# Altium PCB Giro_scope_2.0.PcbDoc
Units mil, origin at the board's own origin, x right, y up, seen from the top; angles counter-clockwise.
Board outline 7875 x 3935 mil, 2 copper layers (Top Layer, Bottom Layer); 230 components, 115 nets, 573 pads, 7 vias.
Unrouted connection lines stored in the file: 365.
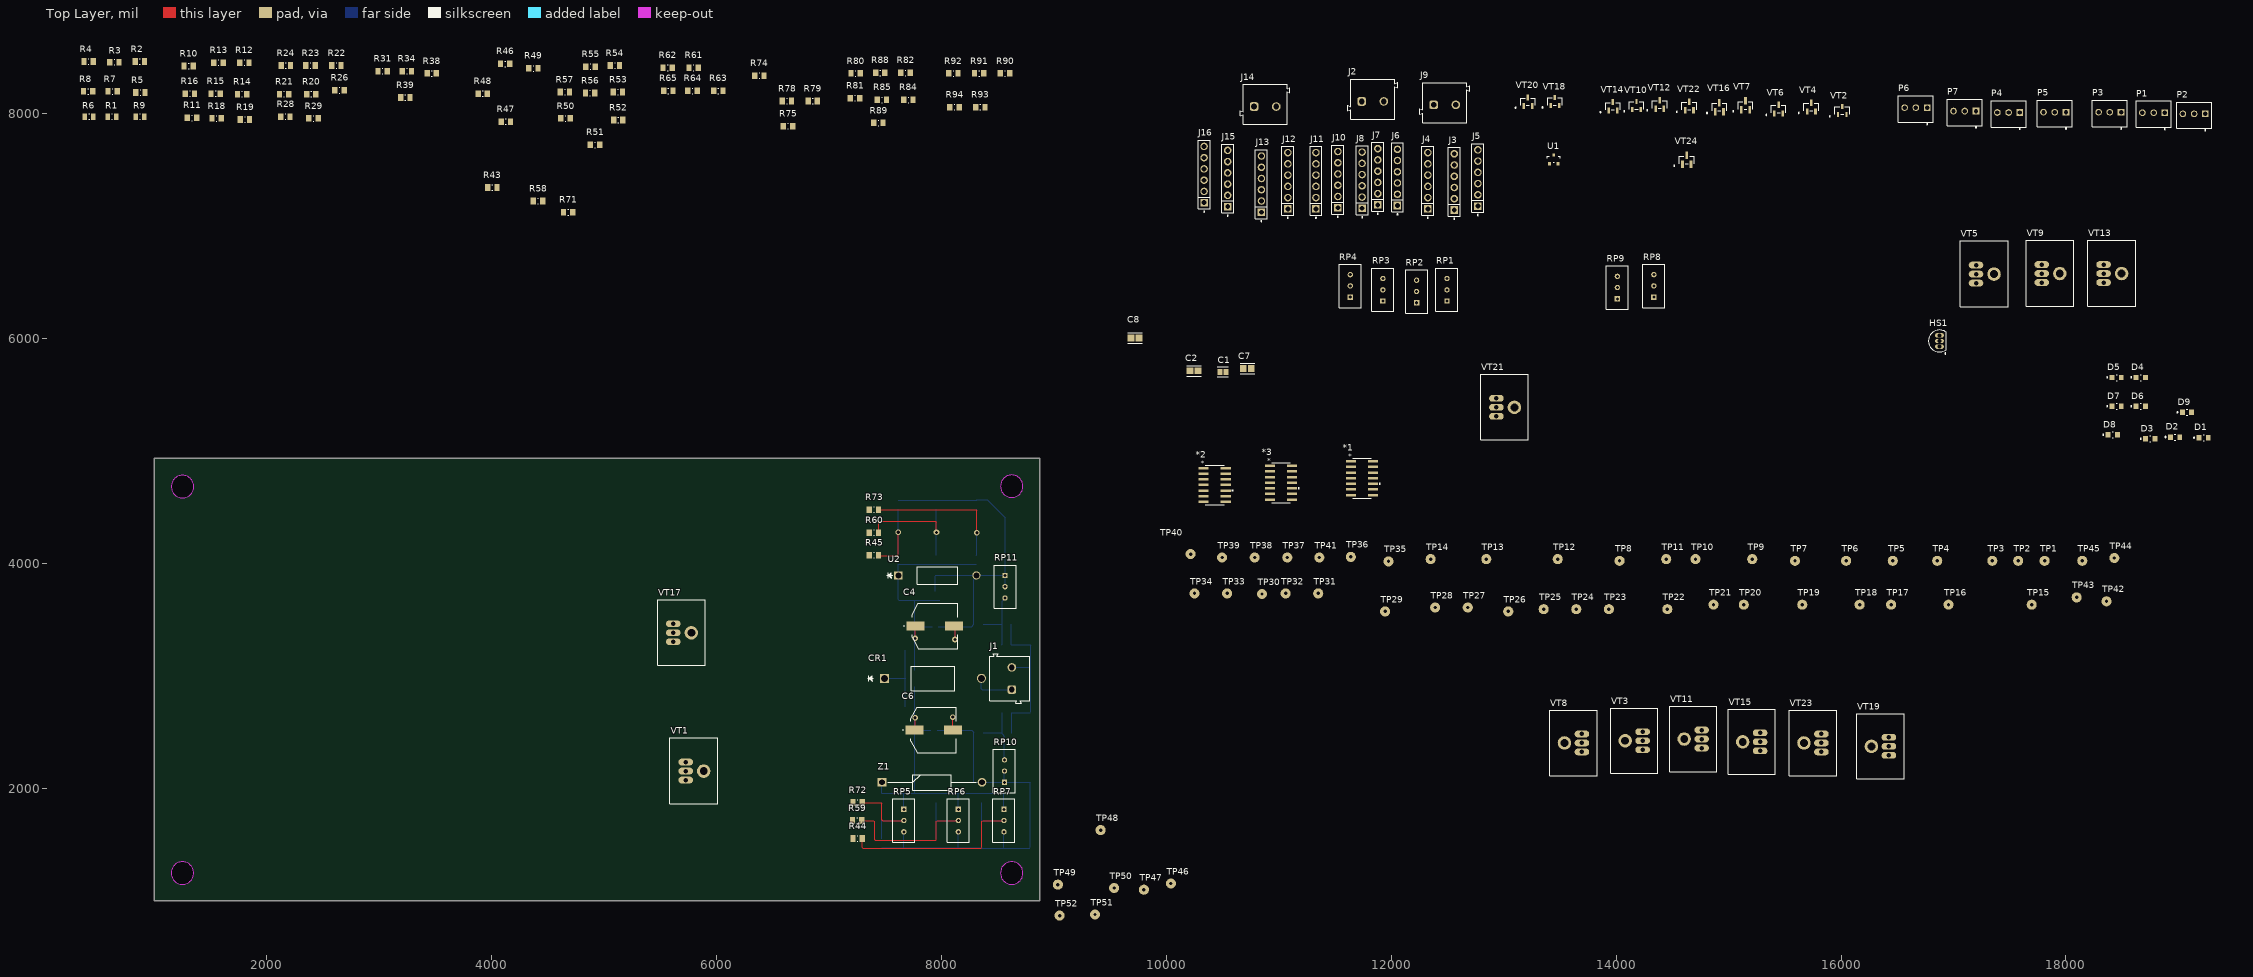
[diagram p0: Top Layer view]
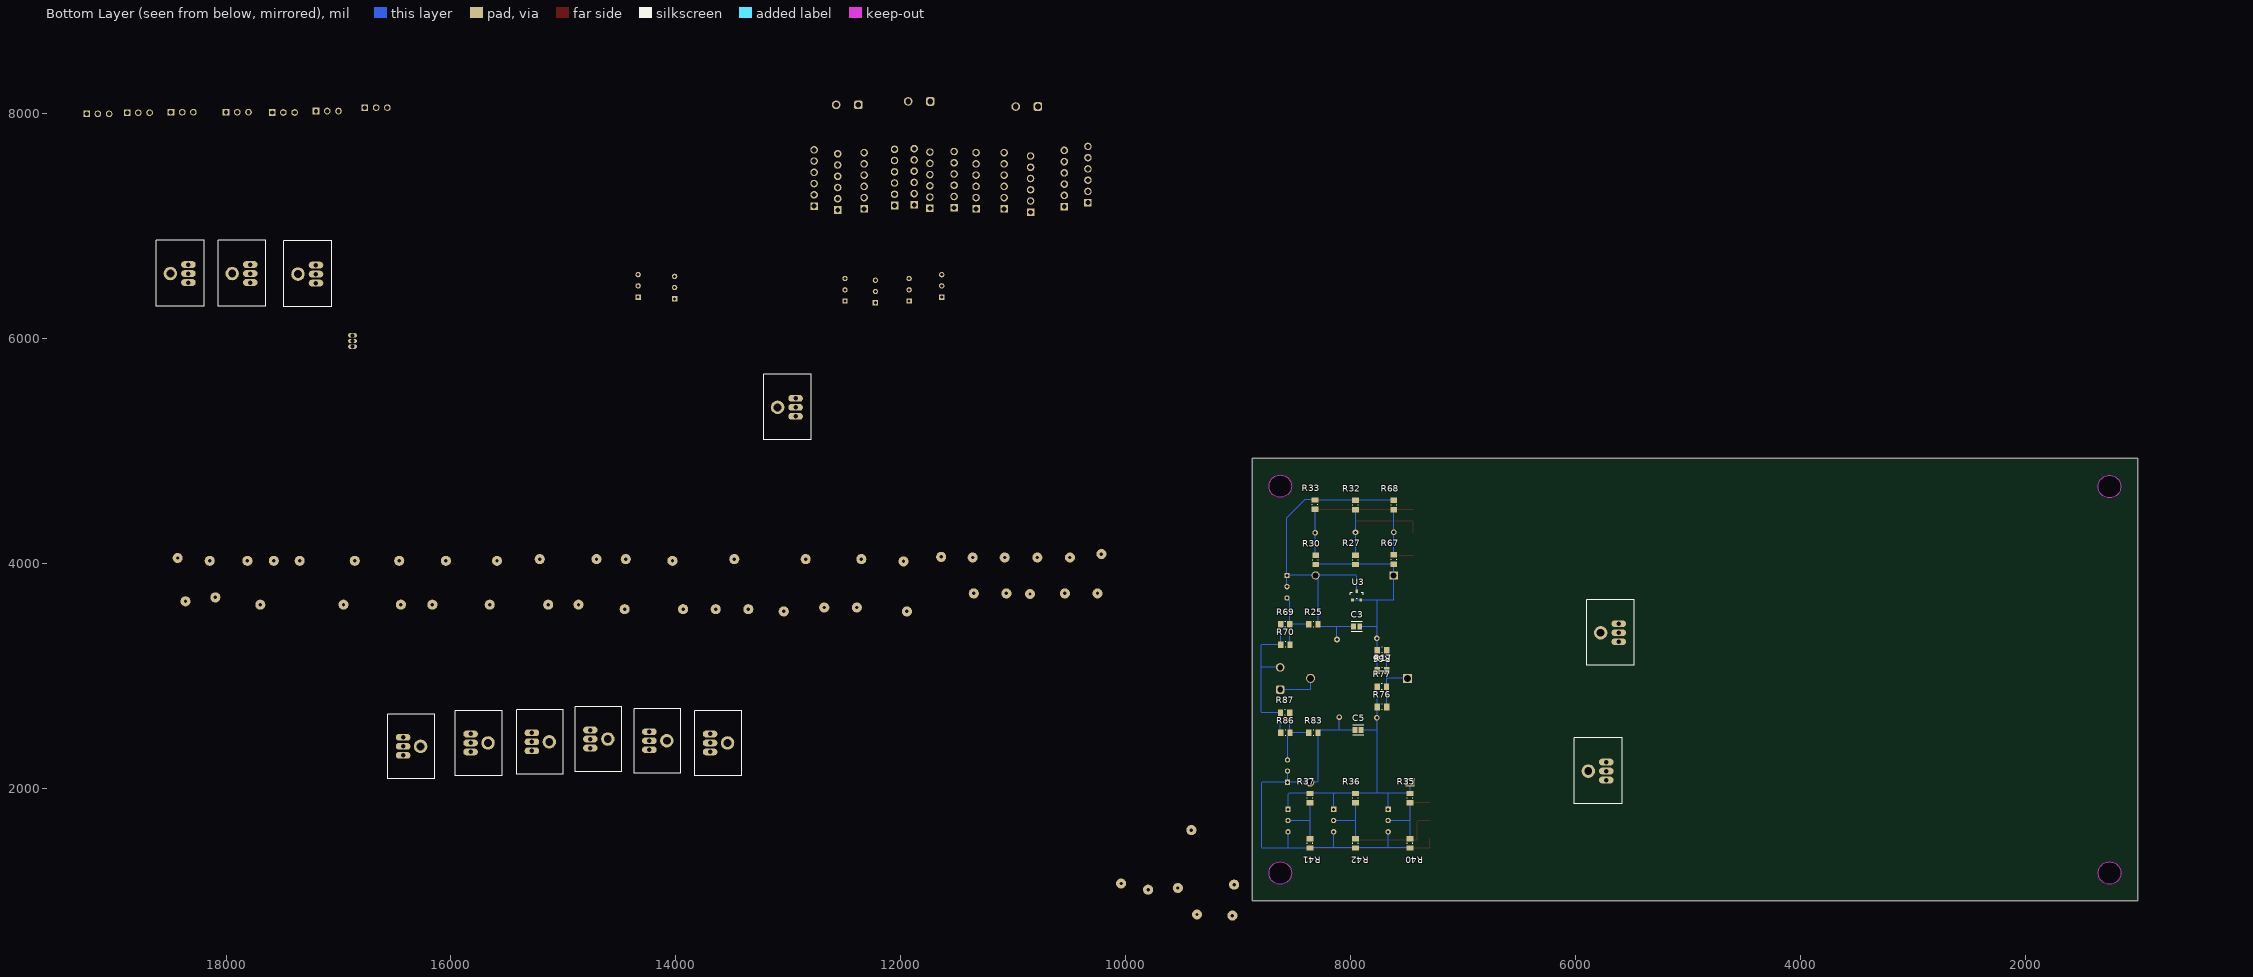
[diagram p1: Bottom Layer view, seen from below]

## Layer stack, top to bottom
Top Solder: solder mask 0.4, Solder Resist, Dk 3.5
Top Layer: signal copper 1.4
Dielectric 1: dielectric 12.6, FR-4, Dk 4.8
Bottom Layer: signal copper 1.4
Bottom Solder: solder mask 0.4, Solder Resist, Dk 3.5

## Board outline
1000,1000 1000,4935 8875,4935 8875,1000
cut-out: 1150,4685 ccw(c1250,4685) 1250,4585 ccw(c1250,4685) 1350,4685 ccw(c1250,4685) 1250,4785 ccw(c1250,4685)
cut-out: 8524.47,4688.47 ccw(c8624.47,4688.47) 8624.47,4588.47 ccw(c8624.47,4688.47) 8724.47,4688.47 ccw(c8624.47,4688.47) 8624.47,4788.47 ccw(c8624.47,4688.47)
cut-out: 8524.47,1248.47 ccw(c8624.47,1248.47) 8624.47,1148.47 ccw(c8624.47,1248.47) 8724.47,1248.47 ccw(c8624.47,1248.47) 8624.47,1348.47 ccw(c8624.47,1248.47)
cut-out: 1149.47,1248.47 ccw(c1249.47,1248.47) 1249.47,1148.47 ccw(c1249.47,1248.47) 1349.47,1248.47 ccw(c1249.47,1248.47) 1249.47,1348.47 ccw(c1249.47,1248.47)

## Design rules (kind name [scope] priority, off if disabled: settings)
Clearance [All] p1: gap=10 ignorepadtopadclearanceinfootprint=FALSE except(0: Arc-Hole Track-Hole SMDPad-Hole THPad-Hole Via-Hole Fill-Hole Poly-Hole Region-Hole Text-Hole)
PolygonConnect [All] p1: connectstyle=Relief reliefconductorwidth=10 reliefentries=4 polygonreliefangle="90 Angle" airgapwidth=10
RoomDefinition Giro_scope_2.0 [InComponentClass('Giro_scope_2.0')] p1: confinementstyle=ConfineIn formatcopy=TRUE lockcomponents=FALSE outline 0,0 45040,0 45040,8680 0,8680
RoutingVias [All] p1: holewidth=28 width=50 viastyle="Through Hole" minholewidth=28 minwidth=50 maxholewidth=28 maxwidth=50
SolderMaskExpansion [All] p1: expansion=4 istentingtop=FALSE
Width [All] p1: maxlimit=10 minlimit=10 preferedwidth=10
30 further rules are at their usual default settings.

## Components (designator, comment, footprint, x,y, rotation, side; value= is the part's Value field where it differs from the comment)
*1 "LM324AD_SOIC14" D14-M 11738.97,4760 r0 top
*2 "LM324AD_SOIC14" D14-M 10428.97,4700 r0 top
*3 "LM324AD_SOIC14" D14-M 11018.97,4720 r0 top
C1 "0.1uF" KEMET_C0805C-DN_IPC_C 10502.59,5705 r0 top
C2 "2.2u" KEMET_C0805C-DN_IPC_A 10245.46,5715 r0 top
C3 "0.1uF" KEMET_C0805C-DN_IPC_C 7945,3440 r180 bottom
C4 "EEE1HA101AP" EEEFK1V331P 7941.26,3445 r270 top
C5 "0.1uF" KEMET_C0805C-DN_IPC_C 7932.41,2520 r180 bottom
C6 "EEE1HA101AP" EEEFK1V331P 7930,2520 r270 top
C7 "2.2u" KEMET_C0805C-DN_IPC_A 10720,5735 r0 top
C8 "2.2u" KEMET_C0805C-DN_IPC_A 9720.46,6005 r0 top
CR1 "1N5822RL" DO-201AD_STM 7493,2980 r0 top
D1 "LED2" Wurth_Electronics_0_MFG 19223.66,5120 r0 top
D2 "LED2" Wurth_Electronics_0_MFG 18970,5125 r0 top
D3 "LED2" Wurth_Electronics_0_MFG 18750,5110 r0 top
D4 "LED2" Wurth_Electronics_0_MFG 18665,5655 r0 top
D5 "LED2" Wurth_Electronics_0_MFG 18450,5655 r0 top
D6 "LED2" Wurth_Electronics_0_MFG 18665,5400 r0 top
D7 "LED2" Wurth_Electronics_0_MFG 18450,5400 r0 top
D8 "LED2" Wurth_Electronics_0_MFG 18416.34,5145 r0 top
D9 "LED2" Wurth_Electronics_0_MFG 19076.34,5345 r0 top
HS1 "Hall_Sensor" TO-92A 16875,5980 r0 top
J1 "691103110003" 691101710002 8605.31,2978.43 r90 top
J2 "691101710002" 691101710002 11835,8130 r0 top
J3 "61300611121" Wurth_61300611121_0 12560,7395 r90 top
J4 "61300611121" Wurth_61300611121_0 12325,7405 r90 top
J5 "61300611121" Wurth_61300611121_0 12770,7430 r90 top
J6 "61300611121" Wurth_61300611121_0 12055,7435 r90 top
J7 "61300611121" Wurth_61300611121_0 11880,7440 r90 top
J8 "61300611121" Wurth_61300611121_0 11740,7410 r90 top
J9 "691101710002" 691101710002 12475,8100 r0 top
J10 "61300611121" Wurth_61300611121_0 11525,7415 r90 top
J11 "61300611121" Wurth_61300611121_0 11330,7405 r90 top
J12 "61300611121" Wurth_61300611121_0 11080,7405 r90 top
J13 "61300611121" Wurth_61300611121_0 10845,7375 r90 top
J14 "691101710002" 691101710002 10878.43,8084.69 r0 top
J15 "61300611121" Wurth_61300611121_0 10545,7425 r90 top
J16 "61300611121" Wurth_61300611121_0 10335,7460 r90 top
P1 "61900311121" 61900311121 18780,7998.19 r0 top
P2 "61900311121" 61900311121 19140,7988.19 r0 top
P3 "61900311121" 61900311121 18390,8003.19 r0 top
P4 "61900311121" 61900311121 17490,8000 r0 top
P5 "61900311121" 61900311121 17900,8003.19 r0 top
P6 "61900311121" 61900311121 16665,8043.19 r0 top
P7 "61900311121" 61900311121 17100,8013.19 r0 top
R1 "24" Vishay_CRCW0805-e3_IPC_B 622.56,7975 r0 top
R2 "100k" Vishay_CRCW0805-e3_IPC_A 870,8465 r0 top
R3 "1M" Vishay_CRCW0805-e3_IPC_A 643.63,8460 r0 top
R4 "47k" Vishay_CRCW0805-e3_IPC_A 415,8465 r0 top
R5 "47k" Vishay_CRCW0805-e3_IPC_A 875,8190 r0 top
R6 "100k" Vishay_CRCW0805-e3_IPC_B 420,7975 r0 top
R7 "47k" Vishay_CRCW0805-e3_IPC_A 628.63,8200 r0 top
R8 "1k" Vishay_CRCW0805-e3_IPC_A 411.37,8200 r0 top
R9 "100k" Vishay_CRCW0805-e3_IPC_B 872.56,7975 r0 top
R10 "1k" Vishay_CRCW0805-e3_IPC_A 1305,8425 r0 top
R11 "1.2k" Vishay_CRCW0805-e3_IPC_A 1335,7965 r0 top
R12 "47k" Vishay_CRCW0805-e3_IPC_A 1800,8455 r0 top
R13 "47k" Vishay_CRCW0805-e3_IPC_A 1570,8455 r0 top
R14 "1M" Vishay_CRCW0805-e3_IPC_A 1780,8175 r0 top
R15 "47k" Vishay_CRCW0805-e3_IPC_A 1545,8180 r0 top
R16 "620" Vishay_CRCW0805-e3_IPC_A 1315,8180 r0 top
R17 "1K" Vishay_CRCW0805-e3_IPC_A 7720,3050 r0 bottom
R18 "3.3k" Vishay_CRCW0805-e3_IPC_A 1553.63,7960 r0 top
R19 "1k" Vishay_CRCW0805-e3_IPC_A 1805,7950 r0 top
R20 "1k" Vishay_CRCW0805-e3_IPC_A 2395,8175 r0 top
R21 "100k" Vishay_CRCW0805-e3_IPC_A 2153.63,8175 r0 top
R22 "47k" Vishay_CRCW0805-e3_IPC_A 2618.63,8430 r0 top
R23 "47k" Vishay_CRCW0805-e3_IPC_A 2388.63,8430 r0 top
R24 "1k" Vishay_CRCW0805-e3_IPC_A 2168.63,8430 r0 top
R25 "1K" Vishay_CRCW0805-e3_IPC_A 8330,3460 r0 bottom
R26 "47k" Vishay_CRCW0805-e3_IPC_A 2646.37,8210 r0 top
R27 "10K" Vishay_CRCW0805-e3_IPC_A 7955,4033.63 r90 bottom
R28 "47k" Vishay_CRCW0805-e3_IPC_A 2165,7975 r0 top
R29 "47k" Vishay_CRCW0805-e3_IPC_A 2415,7960 r0 top
R30 "10K" Vishay_CRCW0805-e3_IPC_A 8310,4033.63 r90 bottom
R31 "47k" Vishay_CRCW0805-e3_IPC_A 3030,8380 r0 top
R32 "10K" Vishay_CRCW0805-e3_IPC_A 7955,4521.37 r90 bottom
R33 "10K" Vishay_CRCW0805-e3_IPC_A 8315,4525 r90 bottom
R34 "1M" Vishay_CRCW0805-e3_IPC_A 3245,8380 r0 top
R35 "5.1k" Vishay_CRCW0805-e3_IPC_A 7470,1915 r90 bottom
R36 "5.1k" Vishay_CRCW0805-e3_IPC_A 7955,1915 r90 bottom
R37 "5.1k" Vishay_CRCW0805-e3_IPC_A 8360,1915 r90 bottom
R38 "100k" Vishay_CRCW0805-e3_IPC_A 3466.37,8360 r0 top
R39 "1k" Vishay_CRCW0805-e3_IPC_A 3231.37,8145 r0 top
R40 "5.1k" Vishay_CRCW0805-e3_IPC_A 7470,1512.74 r270 bottom
R41 "5.1k" Vishay_CRCW0805-e3_IPC_A 8360,1512.74 r270 bottom
R42 "5.1k" Vishay_CRCW0805-e3_IPC_A 7955,1512.74 r270 bottom
R43 "10K" Vishay_CRCW0805-e3_IPC_A 4005,7345 r0 top
R44 "10K" Vishay_CRCW0805-e3_IPC_A 7253.63,1555 r0 top
R45 "3.3k" Vishay_CRCW0805-e3_IPC_A 7398.63,4075 r180 top
R46 "100k" Vishay_CRCW0805-e3_IPC_A 4120,8445 r0 top
R47 "1k" Vishay_CRCW0805-e3_IPC_A 4125,7930 r0 top
R48 "47k" Vishay_CRCW0805-e3_IPC_A 3920,8180 r0 top
R49 "47k" Vishay_CRCW0805-e3_IPC_A 4370,8405 r0 top
R50 "47k" Vishay_CRCW0805-e3_IPC_A 4656.37,7960 r0 top
R51 "1.2k" Vishay_CRCW0805-e3_IPC_A 4918.63,7725 r0 top
R52 "47k" Vishay_CRCW0805-e3_IPC_A 5125,7945 r0 top
R53 "47k" Vishay_CRCW0805-e3_IPC_A 5121.37,8195 r0 top
R54 "1M" Vishay_CRCW0805-e3_IPC_A 5095,8430 r0 top
R55 "47k" Vishay_CRCW0805-e3_IPC_A 4878.63,8420 r0 top
R56 "100k" Vishay_CRCW0805-e3_IPC_A 4875,8185 r0 top
R57 "620" Vishay_CRCW0805-e3_IPC_A 4650,8195 r0 top
R58 "10K" Vishay_CRCW0805-e3_IPC_A 4411.37,7225 r0 top
R59 "10K" Vishay_CRCW0805-e3_IPC_A 7250,1715 r0 top
R60 "3.3k" Vishay_CRCW0805-e3_IPC_A 7398.63,4275 r180 top
R61 "3.3k" Vishay_CRCW0805-e3_IPC_A 5795,8410 r0 top
R62 "1k" Vishay_CRCW0805-e3_IPC_A 5565,8410 r0 top
R63 "1k" Vishay_CRCW0805-e3_IPC_A 6015,8205 r0 top
R64 "100k" Vishay_CRCW0805-e3_IPC_A 5785,8205 r0 top
R65 "1k" Vishay_CRCW0805-e3_IPC_A 5570,8205 r0 top
R66 "1K" Vishay_CRCW0805-e3_IPC_A 7720,3230 r0 bottom
R67 "10K" Vishay_CRCW0805-e3_IPC_A 7615,4036.37 r90 bottom
R68 "10K" Vishay_CRCW0805-e3_IPC_A 7615,4521.37 r90 bottom
R69 "620" Vishay_CRCW0805-e3_IPC_A 8580,3460 r0 bottom
R70 "620" Vishay_CRCW0805-e3_IPC_A 8578.63,3280 r0 bottom
R71 "10K" Vishay_CRCW0805-e3_IPC_A 4680,7125 r0 top
R72 "10K" Vishay_CRCW0805-e3_IPC_A 7253.63,1875 r0 top
R73 "3.3k" Vishay_CRCW0805-e3_IPC_A 7398.63,4480 r180 top
R74 "1M" Vishay_CRCW0805-e3_IPC_A 6380,8340 r0 top
R75 "1k" Vishay_CRCW0805-e3_IPC_A 6635,7890 r0 top
R76 "1K" Vishay_CRCW0805-e3_IPC_A 7720,2725 r0 bottom
R77 "1K" Vishay_CRCW0805-e3_IPC_A 7721.37,2905 r0 bottom
R78 "1k" Vishay_CRCW0805-e3_IPC_A 6625,8115 r0 top
R79 "1.2k" Vishay_CRCW0805-e3_IPC_A 6855,8115 r0 top
R80 "1M" Vishay_CRCW0805-e3_IPC_A 7236.37,8360 r0 top
R81 "620" Vishay_CRCW0805-e3_IPC_A 7230,8140 r0 top
R82 "3.3k" Vishay_CRCW0805-e3_IPC_A 7680,8365 r0 top
R83 "1K" Vishay_CRCW0805-e3_IPC_A 8330,2495 r0 bottom
R84 "1k" Vishay_CRCW0805-e3_IPC_A 7705,8125 r0 top
R85 "1k" Vishay_CRCW0805-e3_IPC_A 7470,8125 r0 top
R86 "620" Vishay_CRCW0805-e3_IPC_A 8578.63,2495 r0 bottom
R87 "620" Vishay_CRCW0805-e3_IPC_A 8581.37,2675 r0 bottom
R88 "1k" Vishay_CRCW0805-e3_IPC_A 7455,8365 r0 top
R89 "1K" Vishay_CRCW0805-e3_IPC_A 7438.63,7920 r0 top
R90 "1K" Vishay_CRCW0805-e3_IPC_A 8565,8360 r0 top
R91 "1K" Vishay_CRCW0805-e3_IPC_A 8335,8360 r0 top
R92 "1K" Vishay_CRCW0805-e3_IPC_A 8105,8360 r0 top
R93 "1K" Vishay_CRCW0805-e3_IPC_A 8345,8060 r0 top
R94 "1K" Vishay_CRCW0805-e3_IPC_A 8115,8060 r0 top
RP1 "10k" Bourns_3296W_MFG 12495,6435 r0 top
RP2 "10k" Bourns_3296W_MFG 12224.8,6420 r0 top
RP3 "10k" Bourns_3296W_MFG 11924.8,6435 r0 top
RP4 "10k" Bourns_3296W_MFG 11635,6470 r0 top
RP5 "10k" Bourns_3296W_MFG 7665.2,1715 r180 top
RP6 "10k" Bourns_3296W_MFG 8150.2,1715 r180 top
RP7 "10k" Bourns_3296W_MFG 8555.2,1715 r180 top
RP8 "10k" Bourns_3296W_MFG 14334.8,6470 r0 top
RP9 "10k" Bourns_3296W_MFG 14010,6455 r0 top
RP10 "1k" Bourns_3296W_MFG 8559.8,2155 r0 top
RP11 "1k" Bourns_3296W_MFG 8565.2,3795 r180 top
TP1 "Test_Point_PCB" Test_Point 17810,4025 r0 top
TP2 "Test_Point_PCB" Test_Point 17575,4025 r0 top
TP3 "Test_Point_PCB" Test_Point 17345,4025 r0 top
TP4 "Test_Point_PCB" Test_Point 16855,4025 r0 top
TP5 "Test_Point_PCB" Test_Point 16460,4025 r0 top
TP6 "Test_Point_PCB" Test_Point 16045,4025 r0 top
TP7 "Test_Point_PCB" Test_Point 15590,4025 r0 top
TP8 "Test_Point_PCB" Test_Point 14030,4025 r0 top
TP9 "Test_Point_PCB" Test_Point 15210,4040 r0 top
TP10 "Test_Point_PCB" Test_Point 14705,4040 r90 top
TP11 "Test_Point_PCB" Test_Point 14445,4040 r90 top
TP12 "Test_Point_PCB" Test_Point 13480,4040 r90 top
TP13 "Test_Point_PCB" Test_Point 12845,4040 r90 top
TP14 "Test_Point_PCB" Test_Point 12350,4040 r90 top
TP15 "Test_Point_PCB" Test_Point 17695,3635 r90 top
TP16 "Test_Point_PCB" Test_Point 16955,3635 r90 top
TP17 "Test_Point_PCB" Test_Point 16445,3635 r90 top
TP18 "Test_Point_PCB" Test_Point 16165,3635 r90 top
TP19 "Test_Point_PCB" Test_Point 15655,3635 r90 top
TP20 "Test_Point_PCB" Test_Point 15135,3635 r90 top
TP21 "Test_Point_PCB" Test_Point 14865,3635 r90 top
TP22 "Test_Point_PCB" Test_Point 14455,3595 r90 top
TP23 "Test_Point_PCB" Test_Point 13935,3595 r90 top
TP24 "Test_Point_PCB" Test_Point 13645,3595 r90 top
TP25 "Test_Point_PCB" Test_Point 13355,3595 r90 top
TP26 "Test_Point_PCB" Test_Point 13040,3575 r90 top
TP27 "Test_Point_PCB" Test_Point 12680,3610 r90 top
TP28 "Test_Point_PCB" Test_Point 12390,3610 r90 top
TP29 "Test_Point_PCB" Test_Point 11945,3575 r90 top
TP30 "Test_Point_PCB" Test_Point 10850,3730 r90 top
TP31 "Test_Point_PCB" Test_Point 11350,3735 r90 top
TP32 "Test_Point_PCB" Test_Point 11060,3735 r90 top
TP33 "Test_Point_PCB" Test_Point 10540,3735 r90 top
TP34 "Test_Point_PCB" Test_Point 10250,3735 r90 top
TP35 "Test_Point_PCB" Test_Point 11975,4020 r90 top
TP36 "Test_Point_PCB" Test_Point 11640,4060 r90 top
TP37 "Test_Point_PCB" Test_Point 11075,4055 r90 top
TP38 "Test_Point_PCB" Test_Point 10785,4055 r90 top
TP39 "Test_Point_PCB" Test_Point 10495,4055 r90 top
TP40 "Test_Point_PCB" Test_Point 10215,4085 r90 top
TP41 "Test_Point_PCB" Test_Point 11360,4055 r90 top
TP42 "Test_Point_PCB" Test_Point 18360,3665 r90 top
TP43 "Test_Point_PCB" Test_Point 18095,3700 r90 top
TP44 "Test_Point_PCB" Test_Point 18430,4050 r90 top
TP45 "Test_Point_PCB" Test_Point 18145,4025 r90 top
TP46 "Test_Point_PCB" Test_Point 10040,1155 r90 top
TP47 "Test_Point_PCB" Test_Point 9800,1100 r90 top
TP48 "Test_Point_PCB" Test_Point 9415,1630 r90 top
TP49 "Test_Point_PCB" Test_Point 9035,1145 r90 top
TP50 "Test_Point_PCB" Test_Point 9535,1115 r90 top
TP51 "Test_Point_PCB" Test_Point 9365,880 r90 top
TP52 "Test_Point_PCB" Test_Point 9050,870 r90 top
U1 "IC_Nexperia_TL431AQDBZR,215_eec" Nexperia_TL431AQDBZR,215_0 13445,7595.63 r0 top
U2 "1N5339BG" CASE_17AA-01_ONS 7616,3895 r0 top
U3 "IC_Nexperia_TL431AQDBZR,215_eec" Nexperia_TL431AQDBZR,215_0 7945,3715 r180 bottom
VT1 "D882" D882 5820,2160 r90 top
VT2 "PMBTA06" SOT-23_ONS-L 16010,8028.97 r0 top
VT3 "B772" PCBComponent_1 14235,2425 r90 top
VT4 "MMBT2907A" SOT-23_ONS 15735,8060 r0 top
VT5 "D882" D882 17295,6580 r90 top
VT6 "PMBTA06" SOT-23_ONS 15445,8042 r0 top
VT7 "MMBT2907A" SOT-23_ONS-M 15150,8075.03 r0 top
VT8 "B772" PCBComponent_1 13695,2405 r90 top
VT9 "D882" D882 17880,6585 r90 top
VT10 "PMBTA06" SOT-23_ONS-L 14180,8075 r0 top
VT11 "B772" PCBComponent_1 14760,2440.28 r90 top
VT12 "MMBT2907A" SOT-23_ONS 14387.5,8083 r0 top
VT13 "D882" D882 18430,6585 r90 top
VT14 "PMBTA06" SOT-23_ONS 13970,8067 r0 top
VT15 "B772" PCBComponent_1 15280,2415 r90 top
VT16 "MMBT2907A" SOT-23_ONS-M 14917.5,8059.97 r0 top
VT17 "D882" D882 5710,3390 r90 top
VT18 "PMBTA06" SOT-23_ONS-L 13455,8108.97 r0 top
VT19 "B772" PCBComponent_1 16425,2375 r90 top
VT20 "MMBT2907A" SOT-23_ONS 13215,8107 r0 top
VT21 "D882" D882 13030,5395 r90 top
VT22 "PMBTA06" SOT-23_ONS 14650,8070 r0 top
VT23 "B772" PCBComponent_1 15825,2405 r90 top
VT24 "MMBT2907A" SOT-23_ONS-M 14627.5,7589.97 r0 top
Z1 "1N5349BRLG" DIOAD2260W109L864D349 7470.24,2055 r0 top

## Footprints (in the part's own frame and the unit in brackets; to place one, negate y for a bottom-side part, rotate by r counter-clockwise, add the part's x,y. Pads: shape width x height; smd on the part's side, far side on the other; paste and mask are expansions set on the pad)
61900311121 [mm] "2.54mm Male Locking Header, 3p"
  rect 1.5x1.5 hole 1: 1(2.54,0.3)
  round 1.5 hole 1: 2(0,0.3) 3(-2.54,0.3)
  silkscreen extent -3.98,-3.52 3.98,2.98, body extent -3.81,-2.9 3.81,2.9, height 11.53
691101710002 [mm] "5,00mm - modular - blue - Horizontal entry with pressure clamp - 12,6mm height - 02p"
  rrect50% 1.95x1.95 hole 1.3: 1(-2.5,-0.5)
  round 1.95 hole 1.3: 2(2.5,-0.5)
  silkscreen extent -5.6,-4.5 5.6,4.5, body extent -5.6,-4.5 5.6,4.5, height 12.65
Bourns_3296W_MFG [mm]
  rect 1.2x1.2 hole 0.7 paste-1000 mask+0: 1(0.005,-2.54)
  round 1.2 hole 0.7 paste-1000 mask+0: 2(0.005,0) 3(0.005,2.54)
  silkscreen extent -2.48,-4.89 2.48,4.89, body extent -2.58,-4.99 2.58,4.99, height 0.25
CASE_17AA-01_ONS [mil]
  rect 73x73 hole 53 mask+0: 1(0,0)
  round 73 hole 53 mask+0: 2(694,0)
  silkscreen extent -102,-78 527,78, body extent -21,-73 716,73, height 145
D14-M [mm]
  rect 2.27x0.558 smd paste+0 mask+0: 1(-2.514,3.81) 2(-2.514,2.54) 3(-2.514,1.27) 4(-2.514,0) 5(-2.514,-1.27) 6(-2.514,-2.54) 7(-2.514,-3.81) 8(2.514,-3.81) 9(2.514,-2.54) 10(2.514,-1.27) 11(2.514,0) 12(2.514,1.27) 13(2.514,2.54) 14(2.514,3.81)
  silkscreen extent -2.12,-4.5 4.16,4.5, body extent -3.1,-4.37 3.1,4.37, height 1.76
D882 [mil]
  oval 60x130 hole 40: 1(75,95) 2(-5,95) 3(-85,95)
  round 120 hole 70: 2(-5,-65)
  silkscreen extent -295,-190 290,235, body extent -300,-195 290,235, height 984
DIOAD2260W109L864D349 [mm]
  rect 1.95x1.95 hole 1.3: 1(0,0)
  round 1.95 hole 1.3: 2(22.6,0)
  silkscreen extent 1.33,-1.75 21.27,1.75, body extent -0.54,-1.84 23.14,1.84, height 3.68
DO-201AD_STM [mil]
  rect 81x81 hole 61 mask+0: 1(0,0)
  round 81 hole 61 mask+0: 2(862,0)
  silkscreen extent -151,-110 623,110, body extent -26,-105 887,105, height 209
EEEFK1V331P [mm]
  rect 2x4.1 smd: 1(0,-4.35) 2(0,4.35)
  silkscreen extent -5.15,-7 5.15,5.15, body extent -5.15,-5.85 5.15,5.85, height 10.3
KEMET_C0805C-DN_IPC_A [mil]
  rect 59.24x61.27 smd paste+0 mask+0: 1(-35.46,0) 2(35.46,0)
  silkscreen extent -65,-46 65,46, body extent -85,-50 85,50, height 10
KEMET_C0805C-DN_IPC_C [mil]
  rect 43.49x53.39 smd paste+0 mask+0: 1(-27.59,0) 2(27.59,0)
  silkscreen extent -49,-44 49,44, body extent -53,-32 53,32, height 10
Nexperia_TL431AQDBZR,215_0 [mm]
  rect 0.6x0.7 smd paste-1000 mask+0: 1(-0.95,-1) 2(0.95,-1) 3(0,1)
  silkscreen extent -1.45,-0.65 1.45,0.65, body extent -1.6,-1.45 1.6,1.45, height 0.25
PCBComponent_1 [mil]
  oval 60x130 hole 40: 1(80,0) 2(0,0) 3(-80,0)
  round 120 hole 70: 2(0,155)
  silkscreen extent -290,-135 290,285, body extent -295,-140 295,290, height 984
SOT-23_ONS [mil]
  rect 22.36x55.56 smd paste+0 mask+0: 1(-37.5,-38) 2(37.5,-38) 3(0,38)
  silkscreen extent -115,-57 65,32, body extent -60,-52 60,52, height 44
SOT-23_ONS-L [mil]
  rect 20.79x43.75 smd paste+0 mask+0: 1(-37.5,-36.03) 2(37.5,-36.03) 3(0,36.03)
  silkscreen extent -115,-57 65,32, body extent -60,-52 60,52, height 44
SOT-23_ONS-M [mil]
  rect 23.94x67.37 smd paste+0 mask+0: 1(-37.5,-39.97) 2(37.5,-39.97) 3(0,39.97)
  silkscreen extent -115,-57 65,32, body extent -60,-52 60,52, height 44
Test_Point [mil]
  round 90 hole 30 unplated paste+4 mask+4: 1(0,0)
TO-92A [mm] "TO, Flat Index; 3 In-Line, Axial Leads; Body Dia. 4.5mm; Leads 0.51 x 0.48 mm (max)"
  oval 2x1 hole 0.9: 1(0,-1.27) 2(0,0) 3(0,1.27)
  silkscreen extent -2.48,-2.95 1.5,2.48, body extent -2.48,-2.5 1.5,2.5, height 6.86
Vishay_CRCW0805-e3_IPC_A [mil]
  rect 47.5x59.38 smd paste+0 mask+0: 1(-41.37,0) 2(41.37,0)
  silkscreen extent -3,-25 3,25, body extent -85,-49 85,49, height 10
Vishay_CRCW0805-e3_IPC_B [mil]
  rect 39.63x55.44 smd paste+0 mask+0: 1(-37.44,0) 2(37.44,0)
  silkscreen extent -3,-25 3,25, body extent -67,-38 67,38, height 10
Wurth_61300611121_0 [mm]
  rect 1.7x1.7 hole 1.1 paste-1000 mask+0: 1(-6.35,0)
  round 1.7 hole 1.1 paste-1000 mask+0: 2(-3.81,0) 3(-1.27,0) 4(1.27,0) 5(3.81,0) 6(6.35,0)
  silkscreen extent -8.49,-1.35 7.77,1.35, body extent -7.87,-1.45 7.87,1.45, height 0.25
Wurth_Electronics_0_MFG [mm]
  rect 1.1x1.2 smd paste+0 mask+0: 1(-1.05,0) 2(1.05,0)
  silkscreen extent -2.27,-0.67 0.13,0.67, body extent -1.7,-0.77 1.7,0.77, height 0.25

## Part data
C1 C3 C5: library part C0805C104J4RACTU, "100pF"
C2 C7 C8: library part C0805C104J4RACTU
C4 C6: "Capacitor Polarised", Manufacturer_Name=Panasonic, Datasheet Link=http://industrial.panasonic.com/cdbs/www-data/pdf/RDE0000/ABA0000C1142.pdf, Manufacturer_Part_Number=EEE1HA101AP
CR1: "No Description Available", Mfr_Name=STMicroelectronics, Copyright="Copyright (C) 2022 Ultra Librarian. All rights reserved.", Manufacturer_Part_Number=1N5822RL, RefDes=RefDes, Type=DEV
D1 D2 D3 D4 D5 D6 D7 D8 D9: "Typical RED, GREEN, YELLOW, AMBER GaAs LED", LatestRevisionDate=17-Jul-2002, LatestRevisionNote="Re-released for DXP Platform.", PackageDescription="SM LED; 2 Flat Leads", PackageReference=3.2X1.6X1.1, PackageVersion=Feb-2002, Published=8-Jun-2000, Publisher="Altium Limited"
J1: library part 691101710002, "WR-TBL Series 101 Horizontal Entry Modular, Through Hole, pitch 5mm, 2p", Manufacturer="Wurth Elektronik", Operating Temperature Max=105°C, Operating Temperature Min=-40°C, Rated Current=16A, Working Voltage=250V, Application="Pressure Clamp", Category="Terminal Blocks", ComponentLink1Description="Manufacturer Link", ComponentLink1URL=https://www.we-online.com/redexpert/article/691101710002?ad, ComponentLink2Description=Datasheet, ComponentLink2URL=https://www.we-online.com/redexpert/spec/691101710002?ad, Manufacturer Part Number=691101710002, Match Code=WR-TBL, Modularity=Yes, Mount="Through Hole", Orientation=Horizontal, Packaging=Box, PCB/Cable/Panel=PCB, Pin Number=2, Pitch=5mm
J2 J9 J14: "WR-TBL Series 101 Horizontal Entry Modular, Through Hole, pitch 5mm, 2p", Manufacturer="Wurth Elektronik", Operating Temperature Max=105°C, Operating Temperature Min=-40°C, Rated Current=16A, Working Voltage=250V, Application="Pressure Clamp", Category="Terminal Blocks", ComponentLink1Description="Manufacturer Link", ComponentLink1URL=https://www.we-online.com/redexpert/article/691101710002?ad, ComponentLink2Description=Datasheet, ComponentLink2URL=https://www.we-online.com/redexpert/spec/691101710002?ad, Manufacturer Part Number=691101710002, Match Code=WR-TBL, Modularity=Yes, Mount="Through Hole", Orientation=Horizontal, Packaging=Box, PCB/Cable/Panel=PCB, Pin Number=2, Pitch=5mm
P1 P2 P3 P4 P5 P6 P7: "WR-WTB THT Male Vertical Locking Header, pitch 2.54mm, 3p", Contact Resistance=20mOhm, Operating Temperature="-40 to +105degC", Rated Current=3A, Withstanding Voltage=1000VAC, Working Voltage=250VAC, ComponentLink1Description=Manufacturer, ComponentLink1URL=http://www.we-online.de, ComponentLink2Description=Datasheet, ComponentLink2URL=https://www.we-online.com/catalog/datasheet/61900311121.pdf, Gender=Male, Mounting Technology=THT, Packaging=Bag, Part Number=61900311121, Pin Number=3, Pitch=2.54mm, Published Date="January 2020", Publisher="Wurth Elektronik", Type=Vertical
R1 R2 R3 R4 R5 R6 R7 R8 R9 R10 R11 R12 R13 R14 R15 R16 R17 R18 R19 R20 R21 R22 R23 R24 R25 R26 R27 R28 R29 R30 R31 R32 R33 R34 R35 R36 R37 R38 R39 R40 R41 R42 R43 R44 R45 R46 R47 R48 R49 R50 R51 R52 R53 R54 R55 R56 R57 R58 R59 R60 R61 R62 R63 R64 R65 R66 R67 R68 R69 R70 R71 R72 R73 R74 R75 R76 R77 R78 R79 R80 R81 R82 R83 R84 R85 R86 R87 R88 R89 R90 R91 R92 R93 R94: library part CRCW08050000Z0EA
RP1 RP2 RP3 RP4 RP5 RP6 RP7 RP8 RP9 RP10 RP11: library part 3296W-1-202LF
TP1 TP2 TP3 TP4 TP5 TP6 TP7 TP8 TP9 TP10 TP11 TP12 TP13 TP14 TP15 TP16 TP17 TP18 TP19 TP20 TP21 TP22 TP23 TP24 TP25 TP26 TP27 TP28 TP29 TP30 TP31 TP32 TP33 TP34 TP35 TP36 TP37 TP38 TP39 TP40 TP41 TP42 TP43 TP44 TP45 TP46 TP47 TP48 TP49 TP50 TP51 TP52: library part TP_PCB?, "Test_Point"
U1 U3: "IC VREF SHUNT ADJ SOT23-3", Current - Cathode=600µA, Current - Output=100mA, Digikey Part Number=1727-4259-1-ND, Manufacturer=Nexperia, Mouser Part Number=771-TL431AQDBZR215, Operating Temperature="-40°C ~ 125°C", Package="TO-236-3, SC-59, SOT-23-3", Part Number=TL431AQDBZR,215, Standard Package=1, Temperature="-40°C to +125°C", Temperature Range High=+125°C, Temperature Range Low=-40°C, Tolerance=±1%, Voltage - Input="2.495 V ~ 36 V", ComponentLink1Description=Upverter, ComponentLink1URL=https://upverter.com/upn/revision/897efb4cb52176e6/, ComponentLink2Description=Datasheet, ComponentLink2URL=http://assets.nexperia.com/documents/data-sheet/TL431_FAM.pdf, Digikey Description="IC VREF SHUNT ADJ SOT23-3", helpURL=https://upverter.com/upn/revision/897efb4cb52176e6/, Lead Free=yes, Mounting Type="Surface Mount", Number of Channels=1, Other Names=568-4890-6, Packaging=Digi-Reel®, Price=0.155797334872, Reference Type="Shunt, Adjustable, Precision", RoHS=TRUE, Supplier 1=Digi-Key, Supplier 2=Mouser, Supplier Part Number 1=1727-4259-1-ND, Supplier Part Number 2=771-TL431AQDBZR215, Voltage - Output="2.495 V ~ 36 V"
U2: "No Description Available", Mfr_Name=onsemi, Copyright="Copyright (C) 2022 Ultra Librarian. All rights reserved.", Manufacturer_Part_Number=1N5339BG, RefDes=RefDes, Type=DEV
VT1 VT5 VT9 VT13 VT17 VT21: library part NPN
VT2 VT6 VT10 VT14 VT18 VT22: library part NPN, "PMBTA06 (S8050)"
VT3 VT8 VT11 VT15 VT19 VT23: library part PNP
VT4 VT7 VT12 VT16 VT20 VT24: library part PNP, "MMBT2907A (S8550G)"
Z1: "Zener Diode", Manufacturer_Name=onsemi, Mouser Part Number=863-1N5349BRLG, Arrow Part Number=1N5349BRLG, Arrow Price/Stock=https://www.arrow.com/en/products/1n5349brlg/on-semiconductor?region=nac, Datasheet Link=https://datasheet.datasheetarchive.com/originals/distributors/SFDatasheet-3/sf-00075052.pdf, Manufacturer_Part_Number=1N5349BRLG, Mouser Price/Stock=https://www.mouser.co.uk/ProductDetail/onsemi/1N5349BRLG?qs=y2kkmE52mdPPPvJa3zV6XA%3D%3D

## Free pads (board coordinates)
  round 40 on Mech10: 1(1129.47,1248.47) 1(1130,4685) 1(1369.47,1248.47) 1(1370,4685) 1(8504.47,1248.47) 1(8504.47,4688.47) 1(8744.47,1248.47) 1(8744.47,4688.47)
  round 40 on Mech11: 1(1132.47,1247.47) 1(1133,4684) 1(1372.47,1247.47) 1(1373,4684) 1(8507.47,1247.47) 1(8507.47,4687.47) 1(8747.47,1247.47) 1(8747.47,4687.47)
  round 240 on Mech10: 1(1249.47,1248.47) 1(1250,4685) 1(8624.47,1248.47) 1(8624.47,4688.47)
  round 240 on Mech11: 1(1252.47,1247.47) 1(1253,4684) 1(8627.47,1247.47) 1(8627.47,4687.47)

## Via types
v1: diameter 50, hole 28, Top Layer to Bottom Layer, 7 vias

## Nets (pads, with @x,y where several pads share a name; then routed paths per layer and width w, separated by ;. In a path a pad name is that pad's centre, name@x,y a point inside that pad or via, vN(x,y) a via of type N, cw(c..) or ccw(c..) an arc to the next point about the centre after c; other vN are vias at no path point)
+5: C3.2 C4.1 P1.3 P3.3 P4.3 P5.3 P6.3 P7.3 R5.2 R13.2 R17.2 R23.2 R27.1 R29.2 R30.1 R49.2 R53.2 R66.2 R67.1 RP1.1 RP2.1 RP3.1 RP4.1 RP8.1 RP9.1 TP1.1 TP13.1 TP25.1 TP46.1 U2.1 U3.1 U3.2 | length 2275.1
  Top Layer w10: v1(7765,3335) 7765,3440 C4.1
  Bottom Layer w10: R17.2 R66.2 7761.37,3440 ; C3.2 7761.37,3440 ; U3.1 U3.2 7767.23,3675.63 ; R30.1 8307.26,3995 R67.1 7615,3896 U2.1 7616,3681.49 7621.86,3675.63 7767.23,3675.63 ; 7761.37,3440 7761.37,3669.77 7767.23,3675.63
+12: *1.4 *2.4 *3.4 C5.2 C6.1 R35.2 R36.2 R37.2 R76.2 R77.2 RP5.1 RP6.1 RP7.1 TP48.1 Z1.1 | length 2813.1
  Top Layer w10: C6.1 7765,2526.26 v1(7765,2630)
  Bottom Layer w10: Z1.1 7470.24,1956.61 R35.2 7665,1956.37 ; RP5.1 7665,1956.37 ; R77.2 7762.74,2525.86 ; C5.2 7768.6,2520 7762.74,2525.86 ; RP6.1 8150,1951.37 8145,1956.37 ; RP7.1 8555,1950.51 8549.14,1956.37 R37.2 8145,1956.37 ; 7665,1956.37 7765,1956.37 ; 7762.74,2525.86 7762.74,1958.63 7765,1956.37 ; 7765,1956.37 R36.2 8145,1956.37
-5: C3.1 C4.2 P1.1 P3.1 P4.1 P5.1 P6.1 P7.1 R7.1 R15.2 R25.1 R26.1 R31.2 R32.2 R33.2 R50.1 R55.2 R68.2 RP1.3 RP2.3 RP3.3 RP4.3 RP8.3 RP9.3 RP11.1 RP11.2 TP47.1 U2.2 U3.3 | length 3395.5
  Top Layer w10: C4.2 8120,3437.52 v1(8120,3325)
  Bottom Layer w10: R68.2 R32.2 8311.37,4562.74 R33.2 8408.63,4566.37 8565,4410 RP11.1 ; U3.3 7945,3889.14 7950.86,3895 U2.2 ; C3.1 8105,3440 8110,3440 8120,3440 ; v1(8120,3325) 8120,3440 ; RP11.2 RP11.1 ; 8120,3440 8269.88,3440 8288.63,3458.75 8288.63,3857.64 8310,3879.01 U2.2 ; U2.2 RP11.1
-12: *1.11 *2.11 *3.11 C5.1 C6.2 D1.2 D6.2 D9.2 R40.2 R41.2 R42.2 R83.1 RP5.3 RP6.3 RP7.3 RP10.1 RP10.2 TP49.1 Z1.2 | length 3983.5
  Top Layer w10: v1(8100,2635) 8100,2521.26 C6.2
  Bottom Layer w10: R40.2 7665,1471.37 ; RP5.3 7665,1471.37 ; C5.1 8100,2520 ; v1(8100,2635) 8100,2520 ; RP6.3 8150,1471.37 ; RP7.3 8555,1475.86 8549.14,1470 ; RP10.2 RP10.1 ; 7665,1471.37 R42.2 8150,1471.37 ; 8100,2520 8269.57,2520 8288.63,2500.94 R83.1 8288.63,2060.86 8294.49,2055 Z1.2 RP10.1 ; 8150,1471.37 R41.2 8361.37,1470 8510,1470 ; 8510,1470 8549.14,1470 ; 8510,1470 8515,1470 8549.14,1470 ; 8549.14,1470 8784.14,1470 8790,1475.86 8790,2049.14 8784.14,2055 RP10.1
GND: C1.1 HS1.2 J1.2 J4.1 J6.1 J6.2 J6.3 J8.1 J11.1 J11.2 J11.3 J13.1 J16.1 J16.2 J16.3 P2.1 R9.2 R69.2 R70.2 R86.2 R87.2 U1.3 | length 1477.1
  Bottom Layer w10: R86.2 8622.74,2497.74 R87.2 8789.14,2675 8795,2680.86 8795,3076.85 ; R69.2 8621.37,3281.37 R70.2 8789.14,3280 8795,3274.14 8795,3076.85 ; J1.2 8795,3076.85
GND_1: J3.1 J3.2 J3.3 J5.6 VT3.2 VT8.2
GND_2: J7.1 J7.2 J7.3 J10.6 VT11.2 VT15.2
GND_3: J12.1 J12.2 J12.3 J15.6 VT19.2 VT23.2
Net*1_1: *1.1 R2.2 R16.2 R18.2 TP6.1
Net*1_2: *1.2 R2.1 R12.2 R13.1 R15.1 RP2.2 TP8.1
Net*1_3: *1.3 R4.2 R5.1 R7.2 RP1.2 TP7.1
Net*1_5: *1.5 R37.1 R41.1 R44.2 RP7.2 | length 2094.7
  Top Layer w10: R44.2 7295,1475.86 7300.86,1470 8354.14,1470 8360,1475.86 8360,1709.14 8365.86,1715 RP7.2
  Bottom Layer w10: R41.1 8360,1713.87 ; R37.1 8360,1713.87 ; RP7.2 8361.13,1715 8360,1713.87
Net*1_6: *1.6 R3.2 TP2.1
Net*1_7: *1.7 J4.4 TP3.1
Net*1_8: *1.8 J4.2 R43.2 TP10.1
Net*1_9: *1.9 R24.2 TP14.1
Net*1_10: *1.10 C2.2 R14.2 R18.1 R20.2 TP9.1
Net*1_12: *1.12 R43.1
Net*1_13: *1.13 R38.1 R44.1
Net*1_14: *1.14 D2.1 D3.2 R38.2 TP50.1
Net*2_1: *2.1 R21.2 R57.2 R61.2 TP15.1
Net*2_2: *2.2 R21.1 R28.2 R29.1 R31.1 RP4.2 TP20.1
Net*2_3: *2.3 R22.2 R23.1 R26.2 RP3.2 TP16.1
Net*2_5: *2.5 *3.5 R36.1 R42.1 R59.2 RP6.2 | length 1711.5
  Top Layer w10: R59.2 7399.14,1715 7405,1709.14 7405,1545.86 7410.86,1540 7949.14,1540 7955,1545.86 7955,1709.14 7960.86,1715 RP6.2
  Bottom Layer w10: R42.1 7955,1720 ; R36.1 7955,1720 ; RP6.2 7960,1715 7955,1720
Net*2_6: *2.6 R34.2 TP21.1
Net*2_7: *2.7 J8.4 TP22.1
Net*2_8: *2.8 J8.2 R58.2 TP27.1
Net*2_9: *2.9 R65.2 TP34.1
Net*2_10: *2.10 C7.2 R54.2 R61.1 R63.2 TP26.1
Net*2_12: *2.12 R58.1
Net*2_13: *2.13 R56.1 R59.1
Net*2_14: *2.14 D4.1 D5.2 R56.2 TP51.1
Net*3_1: *3.1 R46.2 R81.2 R82.2 TP28.1
Net*3_2: *3.2 R46.1 R52.2 R53.1 R55.1 RP9.2 TP30.1
Net*3_3: *3.3 R48.2 R49.1 R50.2 RP8.2 TP29.1
Net*3_6: *3.6 R74.2 TP36.1
Net*3_7: *3.7 J13.4 TP37.1
Net*3_8: *3.8 J13.2 R71.2 TP41.1
Net*3_9: *3.9 R88.2 TP45.1
Net*3_10: *3.10 C8.2 R80.2 R82.1 R85.2 TP40.1
Net*3_12: *3.12 R71.1
Net*3_13: *3.13 R64.1 R72.1
Net*3_14: *3.14 D7.1 D8.2 R64.2 TP52.1
NetC1_2: C1.2 HS1.1 R1.1 R6.1 U1.1
NetC2_1: C2.1 R16.1
NetC7_1: C7.1 R57.1
NetC8_1: C8.1 R81.1
NetCR1_2: CR1.2 J1.1 | length 366.6
  Bottom Layer w10: CR1.2 8355,2885.86 8360.86,2880 J1.1
NetD1_1: D1.1 R20.1
NetD2_2: D2.2 R89.1
NetD3_1: D3.1 R90.1
NetD4_2: D4.2 R91.1
NetD5_1: D5.1 R92.1
NetD6_1: D6.1 R63.1
NetD7_2: D7.2 R93.1
NetD8_1: D8.1 R94.1
NetD9_1: D9.1 R85.1
NetHS1_3: HS1.3 P2.3
NetJ2_1: J2.1 J5.2 R8.1 R11.1 TP4.1 VT1.3 VT3.3
NetJ2_2: J2.2 J5.4 R11.2 R19.1 TP11.1 VT5.3 VT8.3
NetJ4_3: J4.3 R14.1 R24.1
NetJ4_5: J4.5 R3.1
NetJ5_3: J5.3 TP17.1 VT2.1 VT4.1
NetJ5_5: J5.5 TP18.1 VT6.1 VT7.1
NetJ8_3: J8.3 R54.1 R65.1
NetJ8_5: J8.5 R34.1
NetJ9_1: J9.1 J10.2 R39.1 R51.1 TP23.1 VT9.3 VT11.3
NetJ9_2: J9.2 J10.4 R51.2 R62.1 TP31.1 VT13.3 VT15.3
NetJ10_3: J10.3 TP19.1 VT10.1 VT12.1
NetJ10_5: J10.5 TP32.1 VT14.1 VT16.1
NetJ13_3: J13.3 R80.1 R88.1
NetJ13_5: J13.5 R74.1
NetJ14_1: J14.1 J15.2 R75.1 R79.1 TP38.1 VT17.3 VT19.3
NetJ14_2: J14.2 J15.4 R79.2 R84.1 TP42.1 VT21.3 VT23.3
NetJ15_3: J15.3 TP35.1 VT18.1 VT20.1
NetJ15_5: J15.5 TP43.1 VT22.1 VT24.1
NetP1_2: P1.2 R4.1
NetP2_2: P2.2 R1.2
NetP3_2: P3.2 R12.1
NetP4_2: P4.2 R22.1
NetP5_2: P5.2 R28.1
NetP6_2: P6.2 R48.1
NetP7_2: P7.2 R52.1
NetR6_2: R6.2 R9.1 U1.2
NetR8_2: R8.2 R10.1 TP5.1 VT2.3 VT4.3
NetR10_2: R10.2 R19.2 TP12.1 VT6.3 VT7.2
NetR25_2: R25.2 R69.1 R70.1 RP11.3 | length 593.7
  Bottom Layer w10: R25.2 R69.1 ; R70.1 8538.63,3281.37 R69.1 ; RP11.3 8565,3693.12 8538.63,3666.75 R69.1
NetR27_2: R27.2 R32.1 R60.1 | length 1110.6
  Top Layer w10: R60.1 7440,4369.14 7445.86,4375 7949.14,4375 7955,4369.14 v1(7955,4277.5)
  Bottom Layer w10: R27.2 v1(7955,4277.5) R32.1
NetR30_2: R30.2 R33.1 R73.1 | length 1487.3
  Top Layer w10: R73.1 8309.14,4480 8315,4474.14 v1(8315,4275)
  Bottom Layer w10: R30.2 8315,4080 v1(8315,4275) R33.1
NetR35_1: R35.1 R40.1 R72.2 RP5.2 | length 1038.1
  Top Layer w10: R72.2 7464.14,1875 7470,1869.14 7470,1720.86 7475.86,1715 RP5.2
  Bottom Layer w10: R40.1 7470,1713.87 ; R35.1 7470,1713.87 ; RP5.2 7471.13,1715 7470,1713.87
NetR39_2: R39.2 R47.1 TP24.1 VT10.3 VT12.3
NetR45_1: R45.1 R67.2 R68.1 | length 784.8
  Top Layer w10: R45.1 7445,4070 7609.14,4070 7615,4075.86 v1(7615,4278.87)
  Bottom Layer w10: R67.2 v1(7615,4278.87) R68.1
NetR45_2: R45.2 R89.2 R90.2
NetR47_2: R47.2 R62.2 TP33.1 VT14.3 VT16.2
NetR60_2: R60.2 R91.2 R92.2
NetR73_2: R73.2 R93.2 R94.2
NetR75_2: R75.2 R78.1 TP39.1 VT18.3 VT20.3
NetR78_2: R78.2 R84.2 TP44.1 VT22.3 VT24.2
NetR83_2: R83.2 R86.1 R87.1 RP10.3 | length 598
  Bottom Layer w10: R83.2 R86.1 R86.1@8540,2497.74 ; R87.1 R86.1@8540,2497.74 ; RP10.3 8560,2466.32 8540,2486.32 R86.1@8540,2497.74
NetVT1_1: VT1.1 VT2.2
NetVT3_1: VT3.1 VT4.2
NetVT5_1: VT5.1 VT6.2
NetVT7_3: VT7.3 VT8.1
NetVT9_1: VT9.1 VT10.2
NetVT11_1: VT11.1 VT12.2
NetVT13_1: VT13.1 VT14.2
NetVT15_1: VT15.1 VT16.3
NetVT17_1: VT17.1 VT18.2
NetVT19_1: VT19.1 VT20.2
NetVT21_1: VT21.1 VT22.2
NetVT23_1: VT23.1 VT24.3
VCC: CR1.1 J4.6 J6.4 J6.5 J6.6 J8.6 J11.4 J11.5 J11.6 J13.6 J16.4 J16.5 J16.6 R17.1 R66.1 R76.1 R77.1 | length 691.7
  Bottom Layer w10: CR1.1 7676.13,2980 7678.63,2977.5 ; R76.1 7678.63,2977.5 ; R66.1 7678.63,2977.5
VCC_1: J3.4 J3.5 J3.6 J5.1 VT1.2 VT5.2
VCC_2: J7.4 J7.5 J7.6 J10.1 VT9.2 VT13.2
VCC_3: J12.4 J12.5 J12.6 J15.1 VT17.2 VT21.2

## Silkscreen, mask and mechanical layers (free items; w line width, h text height)
Top Solder:
  circle w80: c1250,4685 r120
  circle w80: c8624.47,4688.47 r120
  circle w80: c8624.47,1248.47 r120
  circle w80: c1249.47,1248.47 r120
Bottom Solder:
  circle w80: c1253,4684 r120
  circle w80: c8627.47,4687.47 r120
  circle w80: c8627.47,1247.47 r120
  circle w80: c1252.47,1247.47 r120
Mechanical 1:
  circle w10: c1250,4685 r100
  circle w10: c8624.47,4688.47 r100
  circle w10: c8624.47,1248.47 r100
  circle w10: c1249.47,1248.47 r100
  lines w10: 1000,1000 8875,1000 8875,4935 1000,4935 1000,1000
Bottom Assembly:
  lines w0.5: 1149.47,1238.62 1153.31,1219.3 1160.85,1201.1 1171.8,1184.73 1185.73,1170.8 1202.1,1159.85 1220.3,1152.31 1239.62,1148.47 1249.47,1148.47 1259.32,1148.47 1278.64,1152.31 1296.84,1159.85 1313.22,1170.8 1327.15,1184.73 1338.09,1201.1 1345.63,1219.3 1349.47,1238.62 1349.47,1248.47 1349.47,1258.32 1345.63,1277.64 1338.09,1295.84 1327.15,1312.22 1313.22,1326.15 1296.84,1337.09 1278.64,1344.63 1259.32,1348.47 1249.47,1348.47 1239.62,1348.47 1220.3,1344.63 1202.1,1337.09 1185.73,1326.15 1171.8,1312.22 1160.85,1295.84 1153.31,1277.64 1149.47,1258.32 1149.47,1248.47 1149.47,1238.62 ; 1150,4675.15 1150,4685 1150,4694.85 1153.84,4714.17 1161.38,4732.37 1172.32,4748.75 1186.25,4762.68 1202.63,4773.62 1220.83,4781.16 1240.15,4785 1250,4785 1259.85,4785 1279.17,4781.16 1297.37,4773.62 1313.75,4762.68 1327.68,4748.75 1338.62,4732.37 1346.16,4714.17 1350,4694.85 1350,4685 1350,4675.15 1346.16,4655.83 1338.62,4637.63 1327.68,4621.25 1313.75,4607.32 1297.37,4596.38 1279.17,4588.84 1259.85,4585 1250,4585 1240.15,4585 1220.83,4588.84 1202.63,4596.38 1186.25,4607.32 1172.32,4621.25 1161.38,4637.63 1153.84,4655.83 1150,4675.15 ; 8524.47,1238.62 8528.31,1219.3 8535.85,1201.1 8546.8,1184.73 8560.73,1170.8 8577.1,1159.85 8595.3,1152.31 8614.62,1148.47 8624.47,1148.47 8634.32,1148.47 8653.64,1152.31 8671.84,1159.85 8688.22,1170.8 8702.15,1184.73 8713.09,1201.1 8720.63,1219.3 8724.47,1238.62 8724.47,1248.47 8724.47,1258.32 8720.63,1277.64 8713.09,1295.84 8702.15,1312.22 8688.22,1326.15 8671.84,1337.09 8653.64,1344.63 8634.32,1348.47 8624.47,1348.47 8614.62,1348.47 8595.3,1344.63 8577.1,1337.09 8560.73,1326.15 8546.8,1312.22 8535.85,1295.84 8528.31,1277.64 8524.47,1258.32 8524.47,1248.47 8524.47,1238.62 ; 8524.47,4678.62 8528.31,4659.3 8535.85,4641.1 8546.8,4624.73 8560.73,4610.8 8577.1,4599.85 8595.3,4592.31 8614.62,4588.47 8624.47,4588.47 8634.32,4588.47 8653.64,4592.31 8671.84,4599.85 8688.22,4610.8 8702.15,4624.73 8713.09,4641.1 8720.63,4659.3 8724.47,4678.62 8724.47,4688.47 8724.47,4698.32 8720.63,4717.64 8713.09,4735.84 8702.15,4752.22 8688.22,4766.15 8671.84,4777.09 8653.64,4784.63 8634.32,4788.47 8624.47,4788.47 8614.62,4788.47 8595.3,4784.63 8577.1,4777.09 8560.73,4766.15 8546.8,4752.22 8535.85,4735.84 8528.31,4717.64 8524.47,4698.32 8524.47,4688.47 8524.47,4678.62

## Dimensions
8875,1000 to 8795,1080 on Mechanical 1
8875,4935 to 8795,4855 on Mechanical 1
1085,4855 to 1095,4935 on Mechanical 1
1000,4860 to 1080,4850 on Mechanical 1
1000,1000 to 8875,1000 on Top Paste
1000,1000 to 1110,4935 on Top Paste

## Text inside footprints (layer, text, board x,y; h text height)
*1: Top Overlay "*" at 11617.5,4926.97 h50; Mechanical 13 "*" at 11662.97,4879 h50
*2: Top Overlay "*" at 10307.5,4866.97 h50; Mechanical 13 "*" at 10352.97,4819 h50
*3: Top Overlay "*" at 10897.5,4886.97 h50; Mechanical 13 "*" at 10942.97,4839 h50